# Altium PCB chaser.pcbdoc
Units mil, origin at the board's own origin, x right, y up, seen from the top; angles counter-clockwise.
Board outline 1969.37 x 1748.62 mil, 2 copper layers (Top Layer, Bottom Layer); 19 components, 17 nets, 58 pads, 8 vias.
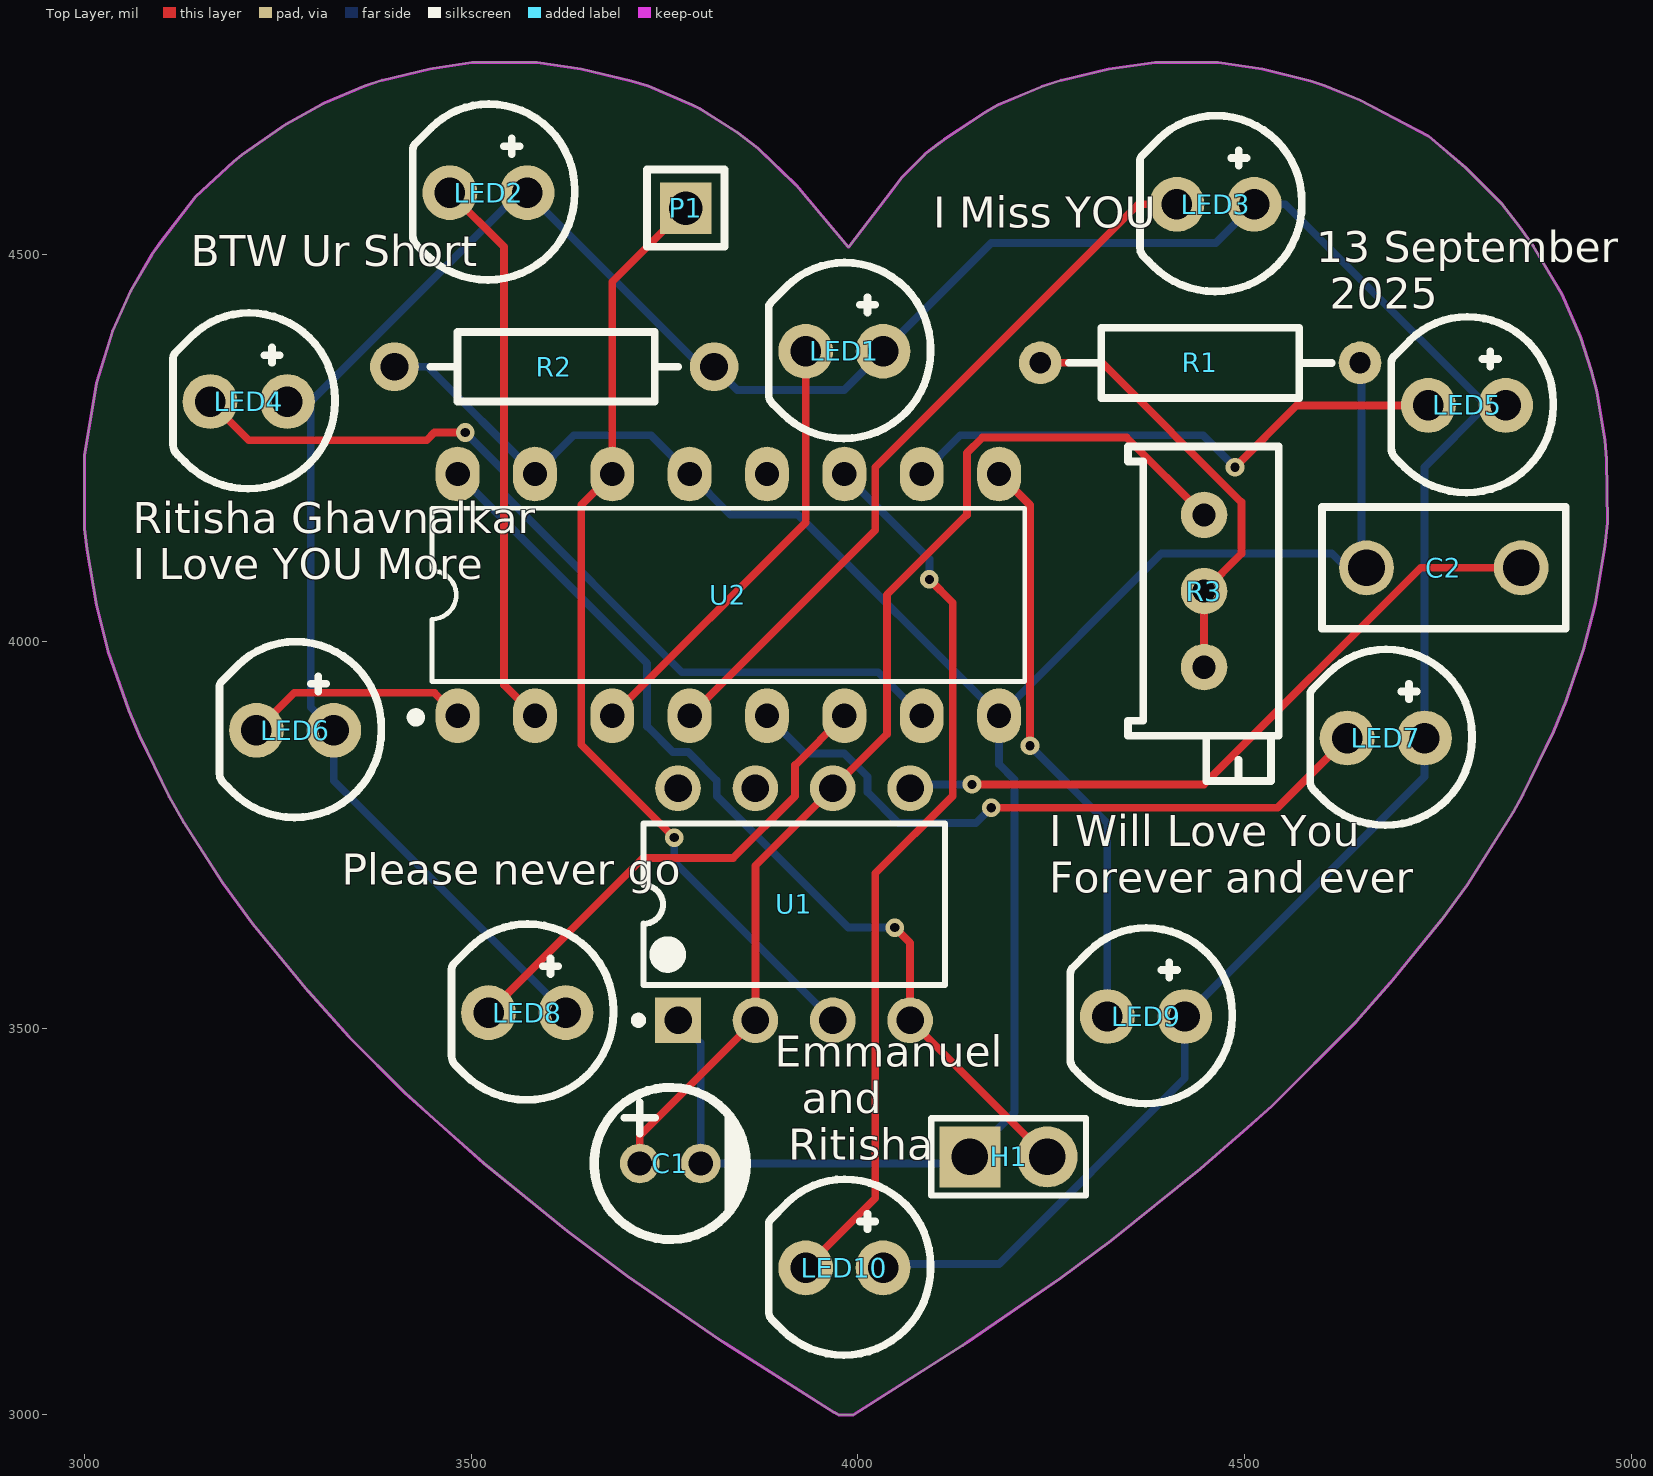
[diagram p0: Top Layer view]
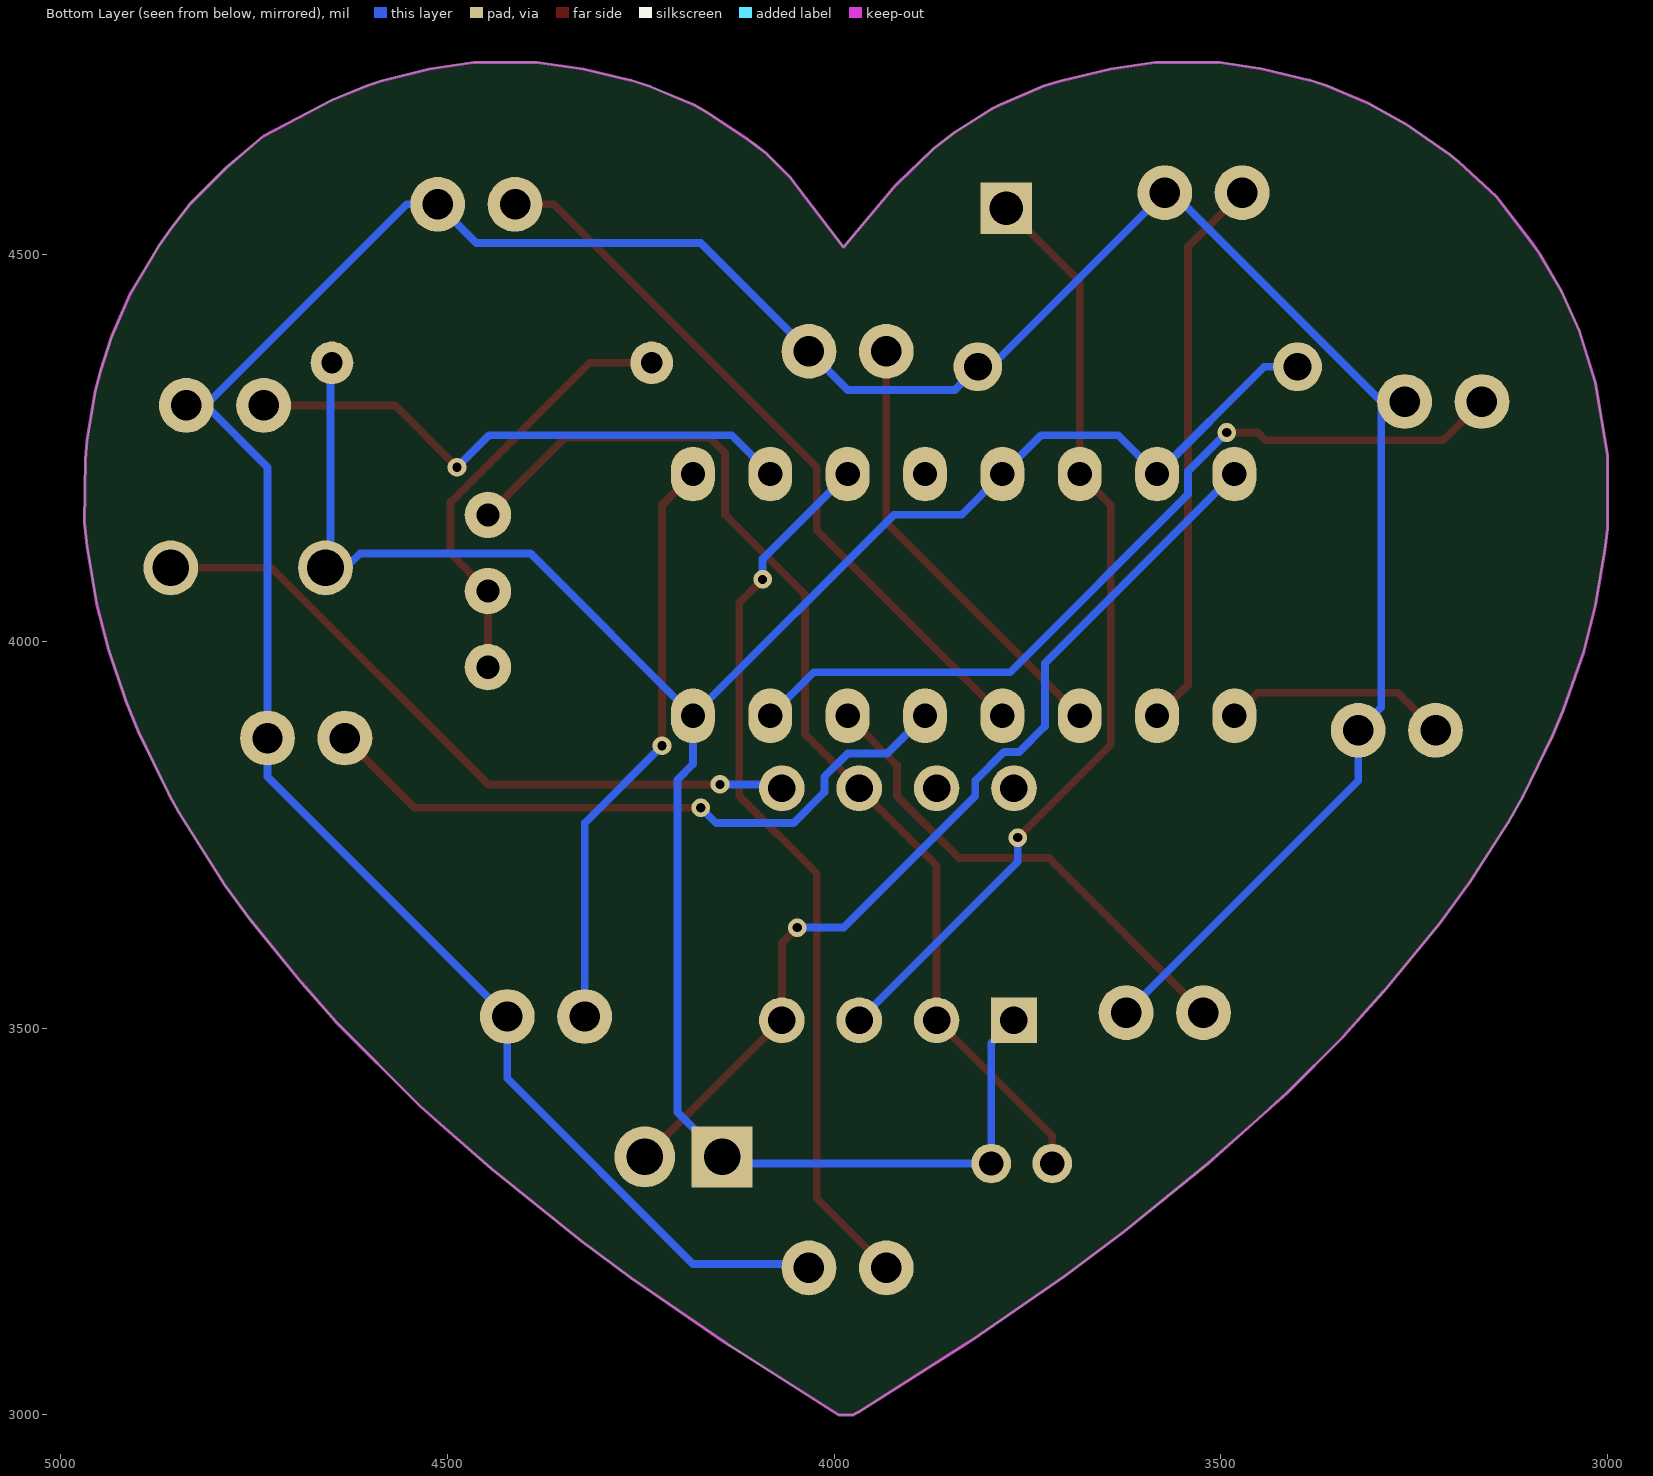
[diagram p1: Bottom Layer view, seen from below]

## Layer stack, top to bottom
Top Layer: signal copper (thickness not stored)
Dielectric: dielectric 12.6, FR-4, Dk 4.8
Bottom Layer: signal copper (thickness not stored)

## Board outline
3987.56,4510.08 3920.2,4589.88 3871.04,4637.6 3842.86,4658.74 3795.93,4688.6 3786.01,4693.56 3728.96,4718.11 3707.11,4724.69 3642.23,4740.18 3585.35,4748.62 3501.02,4748.62 3446.62,4740.18 3384.67,4725.42 3362.37,4718.11 3310.29,4696.04 3307.31,4694.55 3260.81,4668.68 3255.09,4664.86 3203.87,4628.96 3192.98,4620.25 3143.86,4575 3099.78,4517.57 3087.41,4500.14 3060.02,4453.22 3036.71,4401.63 3018.97,4344.55 3015.84,4334.22 3000,4240.16 3000,4145.91 3003.6,4118.72 3015.76,4046.91 3030.64,3987.38 3057.54,3910.52 3071.43,3877.78 3109.71,3799.04 3128.48,3766.17 3179.18,3687.49 3217.67,3634.51 3289.58,3547.61 3342.28,3488.62 3414.21,3416.69 3451.99,3382.59 3516.43,3325.53 3624.59,3237.51 3702.38,3179.18 3821.37,3097.3 3828.81,3092.34 3970.05,3002.98 3972.04,3001.98 3974.76,3000 3994.61,3000 4135.6,3089.86 4141.33,3093.68 4262.03,3176.7 4327.41,3225.11 4443.02,3318.09 4503.63,3371.43 4535.31,3399.33 4644.45,3508.46 4688.48,3558.62 4754.18,3639.47 4787.71,3685.01 4847.26,3779.2 4859.66,3801.52 4899.43,3883.24 4915.3,3922.43 4938,3989.43 4953.61,4049.39 4965.76,4123.68 4969.37,4153.35 4968.01,4235.3 4965.77,4259.9 4955.44,4322.2 4948.65,4349.07 4934.15,4393.69 4910.34,4448.75 4873.21,4510.89 4855.85,4535.7 4832.95,4565.08 4785.83,4612.2 4737.57,4653.33 4649.66,4699.51 4604.52,4718.11 4585.17,4724.56 4522.75,4740.18 4465.87,4748.62 4384.02,4748.62 4324.32,4739.71 4262.7,4725.42 4237.43,4717.12 4180.88,4693.56 4165.5,4684.63 4111.63,4648.81 4103.29,4642.56 4086.38,4629.57 4056.61,4599.8 4044.82,4584.41 3988.41,4509.81

## Design rules (kind name [scope] priority, off if disabled: settings)
BoardOutlineClearance copperThickness1oz [All] p0: genericclearance=10 ignorepadtopadclearanceinfootprint=FALSE except(0: Arc-SplitContinuation Track-SplitContinuation SMDPad-SplitContinuation THPad-SplitContinuation Via-SplitContinuation Fill-SplitContinuation Poly-SplitContinuation Region-SplitContinuation Text-SplitContinuation; 6: Track-CutoutEdge SMDPad-CutoutEdge THPad-CutoutEdge Via-CutoutEdge Region-CutoutEdge; 11.8: Track-OutlineEdge SMDPad-OutlineEdge THPad-OutlineEdge Via-OutlineEdge Fill-OutlineEdge Region-OutlineEdge Poly-OutlineEdge Text-OutlineEdge Fill-CutoutEdge)
BoardOutlineClearance copperThickness2oz [All] p0: genericclearance=10 ignorepadtopadclearanceinfootprint=FALSE except(0: Arc-SplitContinuation Track-SplitContinuation SMDPad-SplitContinuation THPad-SplitContinuation Via-SplitContinuation Fill-SplitContinuation Poly-SplitContinuation Region-SplitContinuation Text-SplitContinuation; 6: Track-CutoutEdge SMDPad-CutoutEdge THPad-CutoutEdge Via-CutoutEdge Region-CutoutEdge; 11.8: Track-OutlineEdge SMDPad-OutlineEdge THPad-OutlineEdge Via-OutlineEdge Fill-OutlineEdge Region-OutlineEdge Poly-OutlineEdge Text-OutlineEdge Fill-CutoutEdge)
Clearance copperThickness1oz [(InNet('$1N1788') OR InNet('$1N1693') OR InNet('$1N1916') OR InNet('$1N1652') OR InNet('$1N1559') OR InNet('$1N1390') OR InNet('$1N1565') OR InNet('$1N1575') OR InNet('$1N1582') OR InNet('$1N1598') OR InNet('$1N1604') OR InNet('$1N1611') OR InNet('$1N1618') OR InNet('$1N1633') OR InNet('$1N1677') OR InNet('$1N1767') OR InNet('$1N1812'))] p1: gap=7 ignorepadtopadclearanceinfootprint=FALSE except(4: Track-Track; 6: Track-SMDPad SMDPad-SMDPad Track-THPad SMDPad-THPad THPad-THPad Track-Via SMDPad-Via THPad-Via Via-Via SMDPad-Fill THPad-Fill Via-Fill Fill-Fill Track-Region SMDPad-Region THPad-Region Via-Region Region-Region Track-Poly SMDPad-Poly THPad-Poly Via-Poly Fill-Poly Region-Poly Poly-Poly Track-Text SMDPad-Text THPad-Text Via-Text Fill-Text Region-Text Poly-Text Text-Text; 6.9: Track-Hole SMDPad-Hole THPad-Hole Via-Hole Fill-Hole Region-Hole Poly-Hole Text-Hole Sheet-Hole; 11.8: Track-Fill Fill-Region Track-Sheet SMDPad-Sheet THPad-Sheet Via-Sheet Fill-Sheet Region-Sheet Poly-Sheet Text-Sheet)
Clearance copperThickness2oz [All] p1: gap=7 ignorepadtopadclearanceinfootprint=FALSE except(6: Track-SMDPad SMDPad-SMDPad Track-THPad SMDPad-THPad THPad-THPad Track-Via SMDPad-Via THPad-Via Via-Via SMDPad-Fill THPad-Fill Via-Fill Fill-Fill Track-Region SMDPad-Region THPad-Region Via-Region Region-Region Track-Poly SMDPad-Poly THPad-Poly Via-Poly Fill-Poly Region-Poly Poly-Poly Track-Text SMDPad-Text THPad-Text Via-Text Fill-Text Region-Text Poly-Text Text-Text; 6.9: Track-Hole SMDPad-Hole THPad-Hole Via-Hole Fill-Hole Region-Hole Poly-Hole Text-Hole Sheet-Hole; 8: Track-Track; 11.8: Track-Fill Fill-Region Track-Sheet SMDPad-Sheet THPad-Sheet Via-Sheet Fill-Sheet Region-Sheet Poly-Sheet Text-Sheet)
DiffPairsRouting differentialPair [All] p1: maxuncoupledlength=10 minlimit=6 maxlimit=6 mostfreqgap=6 toplayer_minwidth=5 toplayer_prefwidth=10 toplayer_maxwidth=100 bottomlayer_minwidth=5 bottomlayer_prefwidth=10 bottomlayer_maxwidth=100
PasteMaskExpansion pasteMaskExpansion [All] p1: expansion=0
PlaneConnect innerPlane [All] p1: planeconnectstyle=Relief reliefexpansion=20 reliefentries=4 reliefconductorwidth=10 reliefairgap=10
PolygonConnect copperRegion [All] p1: connectstyle=Relief reliefentries=4 reliefconductorwidth=10 polygonreliefangle="90 Angle" airgapwidth=10
RoutingVias viaSize [All] p1: viastyle="Through Hole" holewidth=12.0078 minholewidth=11.811 maxholewidth=248.0314 width=24.0158 minwidth=19.685 maxwidth=393.7008
SolderMaskExpansion solderMaskExpansion [All] p1: useseparateexpansions=TRUE expansion=2 expansionbottom=2
Width copperThickness1oz [All] p1: maxlimit=100 minlimit=5 preferedwidth=10
Width copperThickness2oz [All] p1: maxlimit=100 minlimit=8 preferedwidth=10

## Components (designator, comment, footprint, x,y, rotation, side; value= is the part's Value field where it differs from the comment)
C1 "KF010M050C110A" CAP-TH_BD5.0-P2.00-D0.8-FD 3757.56,3325.08 r0 top
C2 "N09F1B103MN0B0S0N0" CAP-TH_L8.0-W4.0-P5.00-D1.2 4757.56,4095.08 r0 top
H1 "PZ254V-11-02P" HDR-TH_2P-P2.54-V-M 4194.92,3333.6 r0 top
LED1 "XL-502UWC" LED-TH_BD5.9-P2.54-RD_WHITE 3982.56,4375.08 r0 top
LED2 "XL-502UWC" LED-TH_BD5.9-P2.54-RD_WHITE 3522.56,4580.08 r0 top
LED3 "XL-502UWC" LED-TH_BD5.9-P2.54-RD_WHITE 4462.56,4565.08 r0 top
LED4 "XL-502UWC" LED-TH_BD5.9-P2.54-RD_WHITE 3212.56,4310.08 r0 top
LED5 "XL-502UWC" LED-TH_BD5.9-P2.54-RD_WHITE 4787.56,4305.08 r0 top
LED6 "XL-502UWC" LED-TH_BD5.9-P2.54-RD_WHITE 3272.56,3885.08 r0 top
LED7 "XL-502UWC" LED-TH_BD5.9-P2.54-RD_WHITE 4682.56,3875.08 r0 top
LED8 "XL-502UWC" LED-TH_BD5.9-P2.54-RD_WHITE 3572.56,3520.08 r0 top
LED9 "XL-502UWC" LED-TH_BD5.9-P2.54-RD_WHITE 4372.56,3515.08 r0 top
LED10 "XL-502UWC" LED-TH_BD5.9-P2.54-RD_WHITE 3982.56,3190.08 r0 top
P1 "2.54-1*1P针" HDR-TH_1P-P2.54-V-M 3777.56,4560.08 r0 top
R1 "MF1/4W-1KΩ±1%T52" RES-TH_BD2.3-L6.5-P10.50-D0.5 4442.56,4360.08 r0 top
R2 "MFR0W4F4700A50" RES-TH_BD2.2-L6.5-P10.50-D0.6 3607.56,4355.08 r0 top
R3 "3296X-1-503_C118912" RES-ADJ-TH_3P-L9.5-W4.85-P2.50-BL-L 4447.56,4065.08 r0 top
U1 "NE555P" DIP-8_L9.8-W6.6-P2.54-LS7.6-BL 3917.56,3660.08 r0 top
U2 "CD4017BE(LX)" PDIP-16_L19.3-W6.4-P2.54-LS7.94-BL 3832.56,4060.08 r0 top

## Footprints (in the part's own frame and the unit in brackets; to place one, negate y for a bottom-side part, rotate by r counter-clockwise, add the part's x,y. Pads: shape width x height; smd on the part's side, far side on the other; paste and mask are expansions set on the pad)
CAP-TH_BD5.0-P2.00-D0.8-FD [mm]
  round 1.3 hole 0.8: 1(-1,0) 2(1,0)
  silkscreen extent -2.5,-2.5 2.5,2.5
CAP-TH_L8.0-W4.0-P5.00-D1.2 [mm]
  round 1.8 hole 1.2: 1(-2.54,0) 2(2.54,0)
  silkscreen extent -4,-2 4,2
DIP-8_L9.8-W6.6-P2.54-LS7.6-BL [mm]
  rect 1.5x1.5 hole 0.9: 1(-3.81,-3.81)
  round 1.5 hole 0.9: 2(-1.27,-3.81) 3(1.27,-3.81) 4(3.81,-3.81) 5(3.81,3.81) 6(1.27,3.81) 7(-1.27,3.81) 8(-3.81,3.81)
  silkscreen extent -5.23,-3.93 4.96,2.65
HDR-TH_1P-P2.54-V-M [mm]
  rect 1.7x1.7 hole 1.1: 1(0,0)
  silkscreen extent -1.27,-1.27 1.27,1.27
HDR-TH_2P-P2.54-V-M [mm]
  rect 2x2 hole 1.2: 1(-1.27,0)
  round 2 hole 1.2: 2(1.27,0)
  silkscreen extent -2.54,-1.27 2.54,1.27
LED-TH_BD5.9-P2.54-RD_WHITE [mm]
  round 1.8 hole 1: 1(-1.27,0) 2(1.27,0)
  silkscreen extent -2.49,-2.86 2.83,2.91
PDIP-16_L19.3-W6.4-P2.54-LS7.94-BL [mm]
  oval 1.44x1.8 hole 0.8: 1(-8.89,-3.97) 2(-6.35,-3.97) 3(-3.81,-3.97) 4(-1.27,-3.97) 5(1.27,-3.97) 6(3.81,-3.97) 7(6.35,-3.97) 8(8.89,-3.97) 9(8.89,3.97) 10(6.35,3.97) 11(3.81,3.97) 12(1.27,3.97) 13(-1.27,3.97) 14(-3.81,3.97) 15(-6.35,3.97) 16(-8.89,3.97)
  silkscreen extent -10.41,-4.17 9.73,2.84
RES-ADJ-TH_3P-L9.5-W4.85-P2.50-BL-L [mil]
  round 60 hole 30: 1(0,98.43) 2(0,-0.01) 3(0,-98.43)
  silkscreen extent -98,-246 96,187
RES-TH_BD2.2-L6.5-P10.50-D0.6 [mm]
  round 1.6 hole 0.914: 1(-5.25,0) 2(5.25,0)
  silkscreen extent -4.06,-1.14 4.06,1.14
RES-TH_BD2.3-L6.5-P10.50-D0.5 [mm]
  round 1.4 hole 0.7: 1(-5.25,0) 2(5.25,0)
  silkscreen extent -4.32,-1.15 4.32,1.15

## Via types
v1: diameter 24.02, hole 12.01, Top Layer to Bottom Layer, 8 vias

## Nets (pads, with @x,y where several pads share a name; then routed paths per layer and width w, separated by ;. In a path a pad name is that pad's centre, name@x,y a point inside that pad or via, vN(x,y) a via of type N, cw(c..) or ccw(c..) an arc to the next point about the centre after c; other vN are vias at no path point)
$1N1390: LED1.2 LED2.2 LED3.2 LED4.2 LED5.2 LED6.2 LED7.2 LED8.2 LED9.2 LED10.2 R2.2 | length 4449.3
  Bottom Layer w10: LED4.2 LED4.2@3292.56,4310.08 ; LED8.2 3322.56,3820.08 LED6.2 3292.56,3915.08 LED4.2@3292.56,4310.08 ; LED10.2 4037.56,3195.08 4182.56,3195.08 4422.56,3435.08 LED9.2 4732.56,3825.08 LED7.2 4732.56,4225.08 LED5.2@4812.56,4305.08 ; LED5.2 LED5.2@4812.56,4305.08 ; LED4.2@3292.56,4310.08 3562.56,4580.08 LED2.2 3797.56,4355.08 R2.2 3844.25,4325.08 3982.56,4325.08 LED1.2 4172.56,4515.08 4462.56,4515.08 LED3.2 4552.56,4565.08 LED5.2@4812.56,4305.08
$1N1559: LED1.1 U2.3 | length 574.9
  Top Layer w10: U2.3 3932.56,4153.78 LED1.1
$1N1565: LED2.1 U2.2 | length 721.9
  Top Layer w10: LED2.1 3542.56,4510.08 3542.56,3943.78 U2.2
$1N1575: LED3.1 U2.4 | length 951.5
  Top Layer w10: U2.4 4022.56,4143.78 4022.56,4225.08 4362.56,4565.08 LED3.1
$1N1582: LED4.1 U2.7 | length 1114.2
  Top Layer w10: LED4.1 3212.56,4260.08 3442.56,4260.08 3452.56,4270.08 v1(3492.56,4270.08)
  Bottom Layer w10: v1(3492.56,4270.08) 3542.56,4220.08 3542.56,4190.08 3772.56,3960.08 4026.26,3960.08 U2.7
$1N1598: LED5.1 U2.10 | length 726
  Top Layer w10: v1(4487.56,4225.08) 4567.56,4305.08 LED5.1
  Bottom Layer w10: U2.10 4132.56,4266.38 4446.26,4266.38 v1(4487.56,4225.08)
$1N1604: LED6.1 U2.1 | length 292.6
  Top Layer w10: LED6.1 3271.26,3933.78 3452.56,3933.78 U2.1
$1N1611: LED7.1 U2.5 | length 864.7
  Top Layer w10: v1(4172.56,3785.08) 4542.56,3785.08 LED7.1
  Bottom Layer w10: U2.5 3931.26,3855.08 3982.56,3855.08 4012.56,3825.08 4012.56,3805.08 4052.56,3765.08 4152.56,3765.08 v1(4172.56,3785.08)
$1N1618: LED8.1 U2.6 | length 642.4
  Top Layer w10: LED8.1 3722.56,3720.08 3838.86,3720.08 3918.86,3800.08 3918.86,3840.08 U2.6
$1N1633: LED9.1 U2.9 | length 759.3
  Top Layer w10: U2.9 4222.56,4176.38 v1(4222.56,3865.08)
  Bottom Layer w10: v1(4222.56,3865.08) 4322.56,3765.08 LED9.1
$1N1652: H1.2 U1.4 U2.16 | length 1245.9
  Top Layer w10: v1(4047.56,3630.08) 4067.56,3610.08 U1.4 4244.04,3333.6 H1.2
  Bottom Layer w10: U2.16 3727.56,3971.38 3727.56,3890.08 3760.55,3857.09 3780.55,3857.09 3817.56,3820.08 3817.56,3800.08 3987.56,3630.08 v1(4047.56,3630.08)
$1N1677: LED10.1 U2.11 | length 1163
  Top Layer w10: LED10.1 4022.56,3280.08 4022.56,3700.08 4122.56,3800.08 4122.56,4050.08 v1(4092.56,4080.08)
  Bottom Layer w10: U2.11 4092.56,4106.38 v1(4092.56,4080.08)
$1N1693: C1.2 C2.1 H1.1 R1.2 R2.1 U1.1 U2.8 U2.13 U2.15 | length 2996.6
  Bottom Layer w10: R2.1 3443.86,4355.08 U2.15 3632.56,4266.38 3732.56,4266.38 U2.13 3835.16,4163.78 3922.56,4163.78 U2.8 ; U1.1 3796.93,3480.71 C1.2 4136.4,3325.08 H1.1 4202.56,3391.24 4202.56,3821.24 4182.56,3841.24 U2.8 ; R1.2@4649.25,4360.08 4651.26,4358.07 C2.1@4651.26,4095.08 ; C2.1 C2.1@4651.26,4095.08 ; U2.8 4392.56,4113.78 4612.56,4113.78 4631.26,4095.08 C2.1@4651.26,4095.08
$1N1767: P1.1 U1.3 U2.14 | length 1240.5
  Top Layer w10: v1(3762.56,3746.38) 3642.56,3866.38 3642.56,4176.38 U2.14 3682.56,4465.08 P1.1
  Bottom Layer w10: v1(3762.56,3746.38) 3762.56,3715.08 U1.3
$1N1788: C1.1 R3.1 U1.2 U1.6 | length 1449.8
  Top Layer w10: C1.1 3718.19,3360.71 U1.2 3867.56,3710.08 U1.6 4037.56,3880.08 4037.56,4060.08 4140.98,4163.5 4140.98,4243.5 4160.98,4263.5 4347.56,4263.5 R3.1
$1N1812: R1.1 R3.2 R3.3 | length 568
  Top Layer w10: R1.1 4315.87,4360.08 4495.87,4180.08 4495.87,4113.38 R3.2 R3.3
$1N1916: C2.2 U1.5 | length 908.1
  Top Layer w10: v1(4147.56,3815.08) 4447.56,3815.08 4727.56,4095.08 C2.2
  Bottom Layer w10: U1.5 4072.56,3815.08 v1(4147.56,3815.08)
pads on no net: U1.7 U1.8 U2.12

## Keep-outs
Board Outline Layer:
  the board outline again, w3.94

## Silkscreen, mask and mechanical layers (free items; w line width, h text height)
Top Silkscreen Layer:
  text "I Miss YOU" at 4097.56,4535.08 h40
  text "BTW Ur Short" at 3137.56,4485.08 h40
  text "13 September /  2025" at 4592.56,4430.08 h40
  text "Ritisha Ghavnalkar  / I Love YOU More" at 3062.56,4080.08 h40
  text "Please never go" at 3332.56,3685.08 h40
  text "I Will Love You  / Forever and ever" at 4247.56,3675.08 h40
  text "Emmanuel  /   and  /  Ritisha" at 3892.56,3330.08 h40